# Altium PCB PenguinPi_HAT.PcbDoc
Units mil, origin at the board's own origin, x right, y up, seen from the top; angles counter-clockwise.
Board outline 2559.11 x 2204.72 mil, 2 copper layers (Top Layer, Bottom Layer); 43 components, 59 nets, 184 pads, 32 vias.
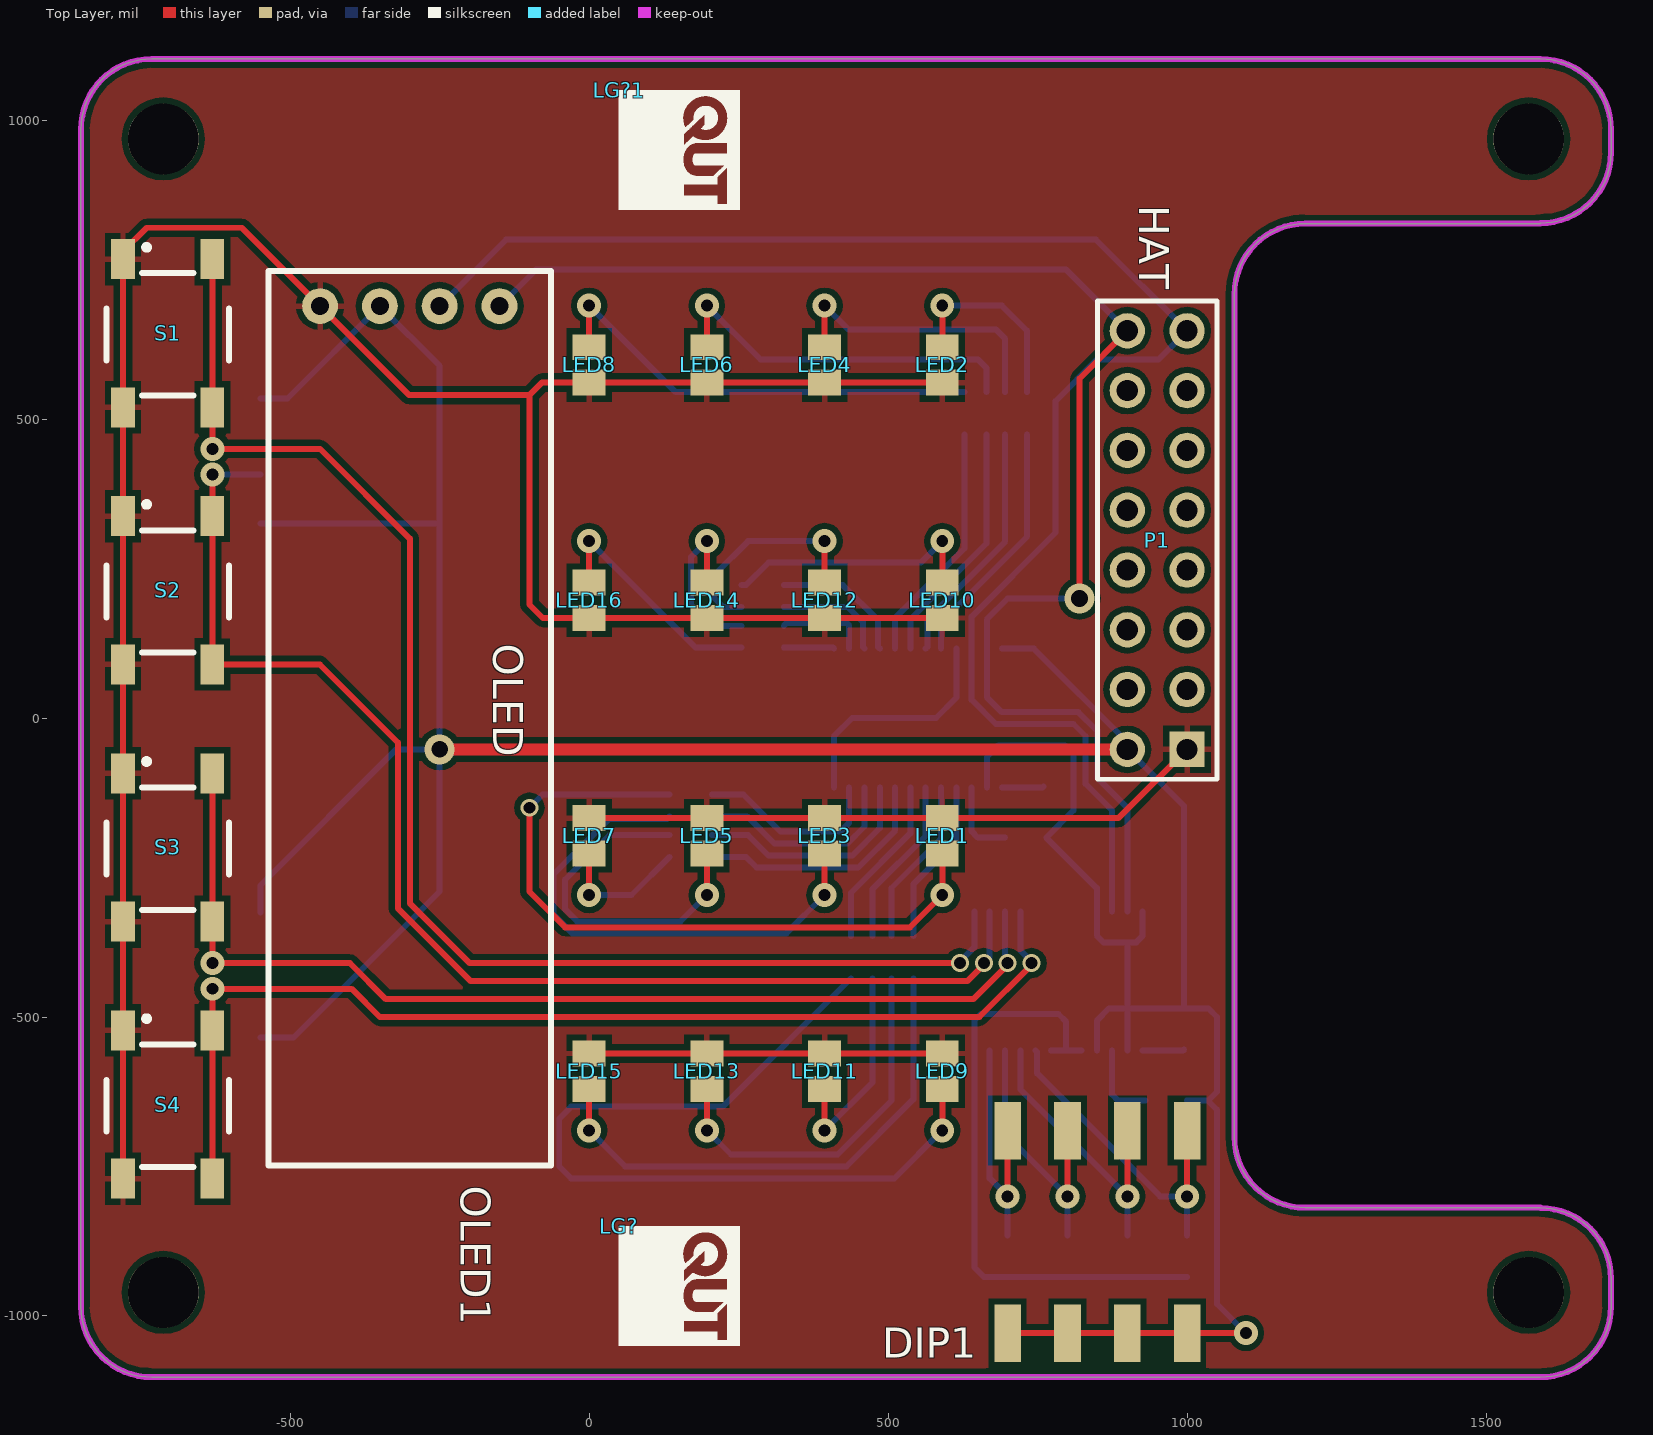
[diagram p0: Top Layer view]
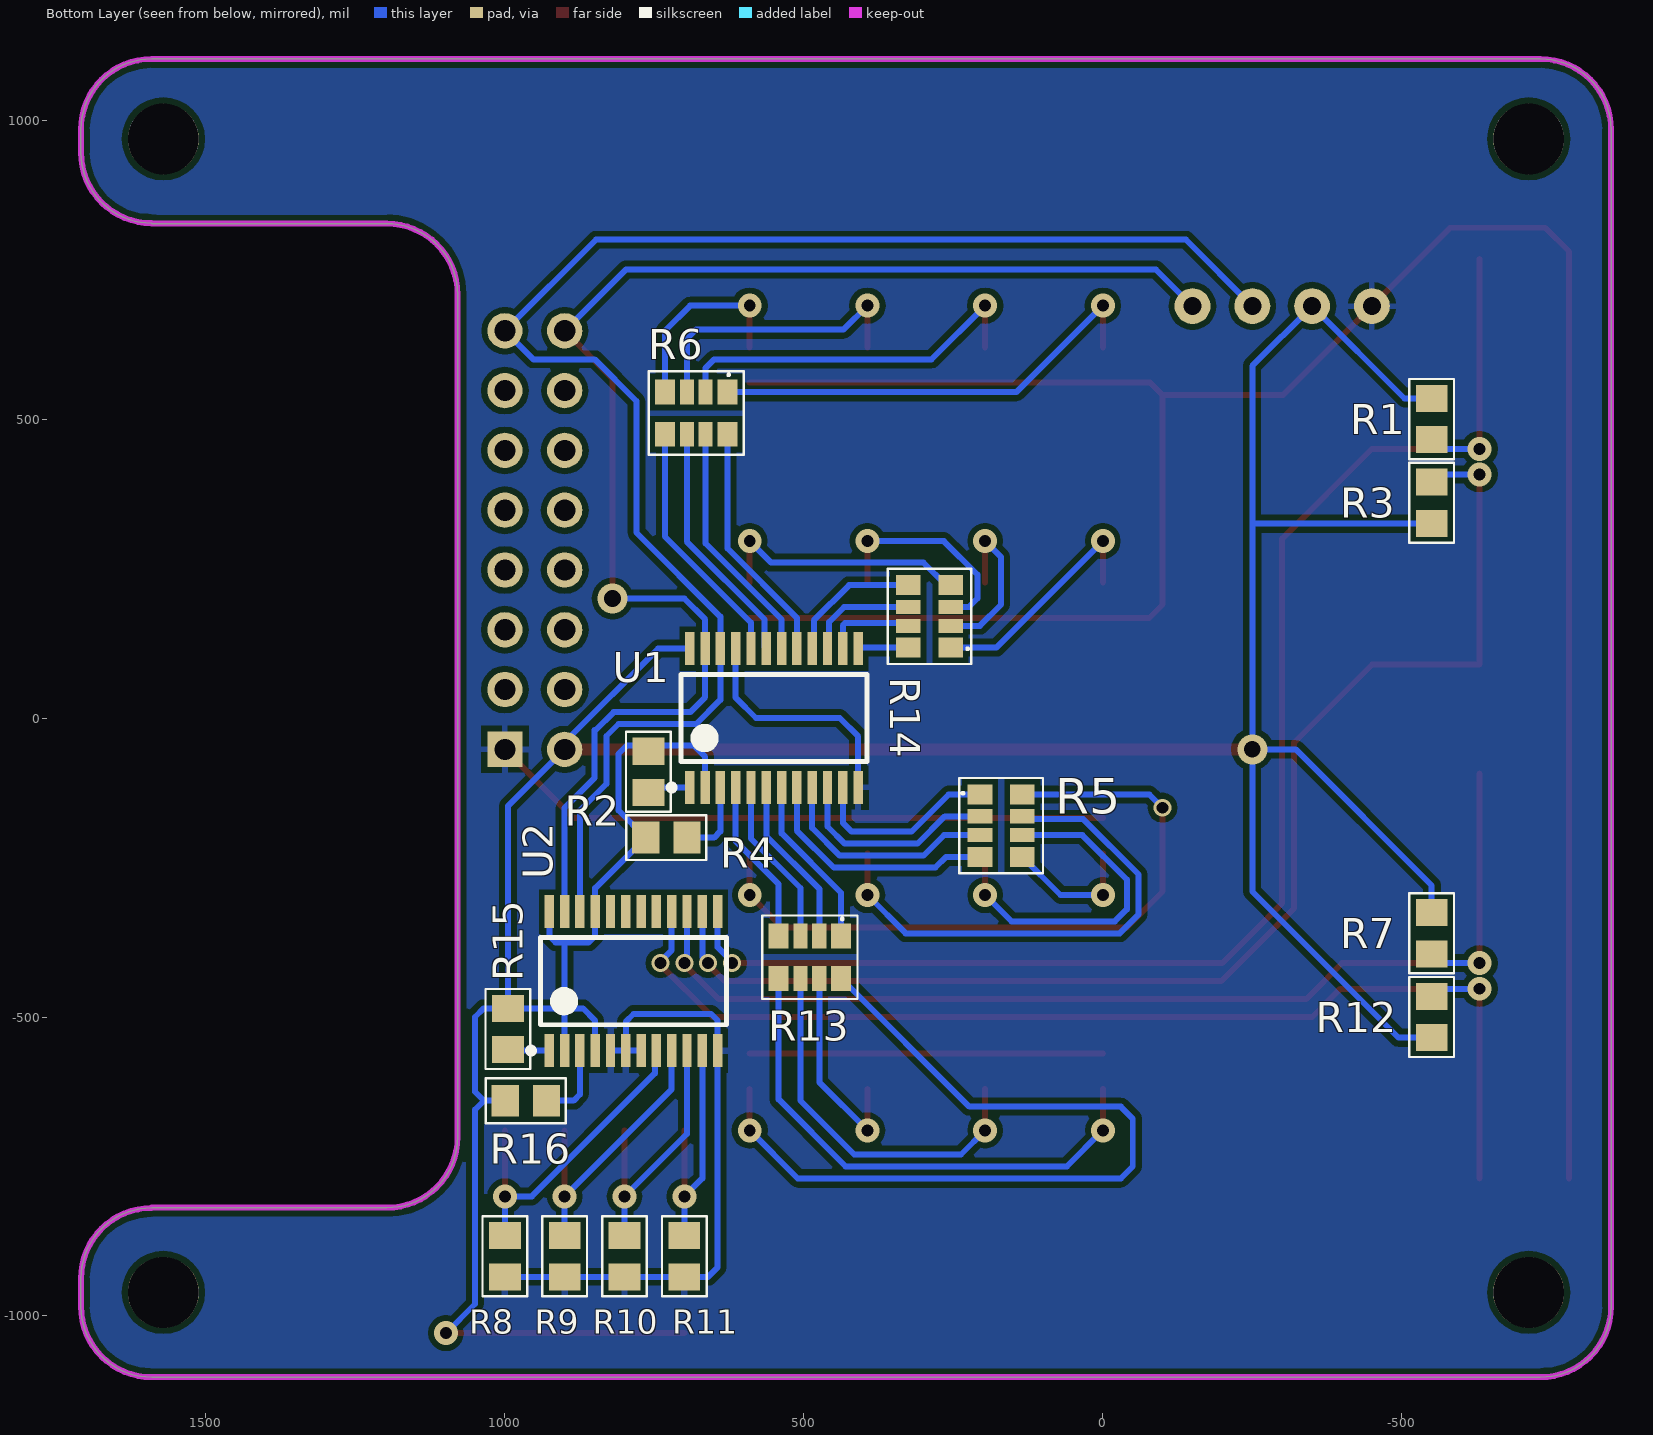
[diagram p1: Bottom Layer view, seen from below]
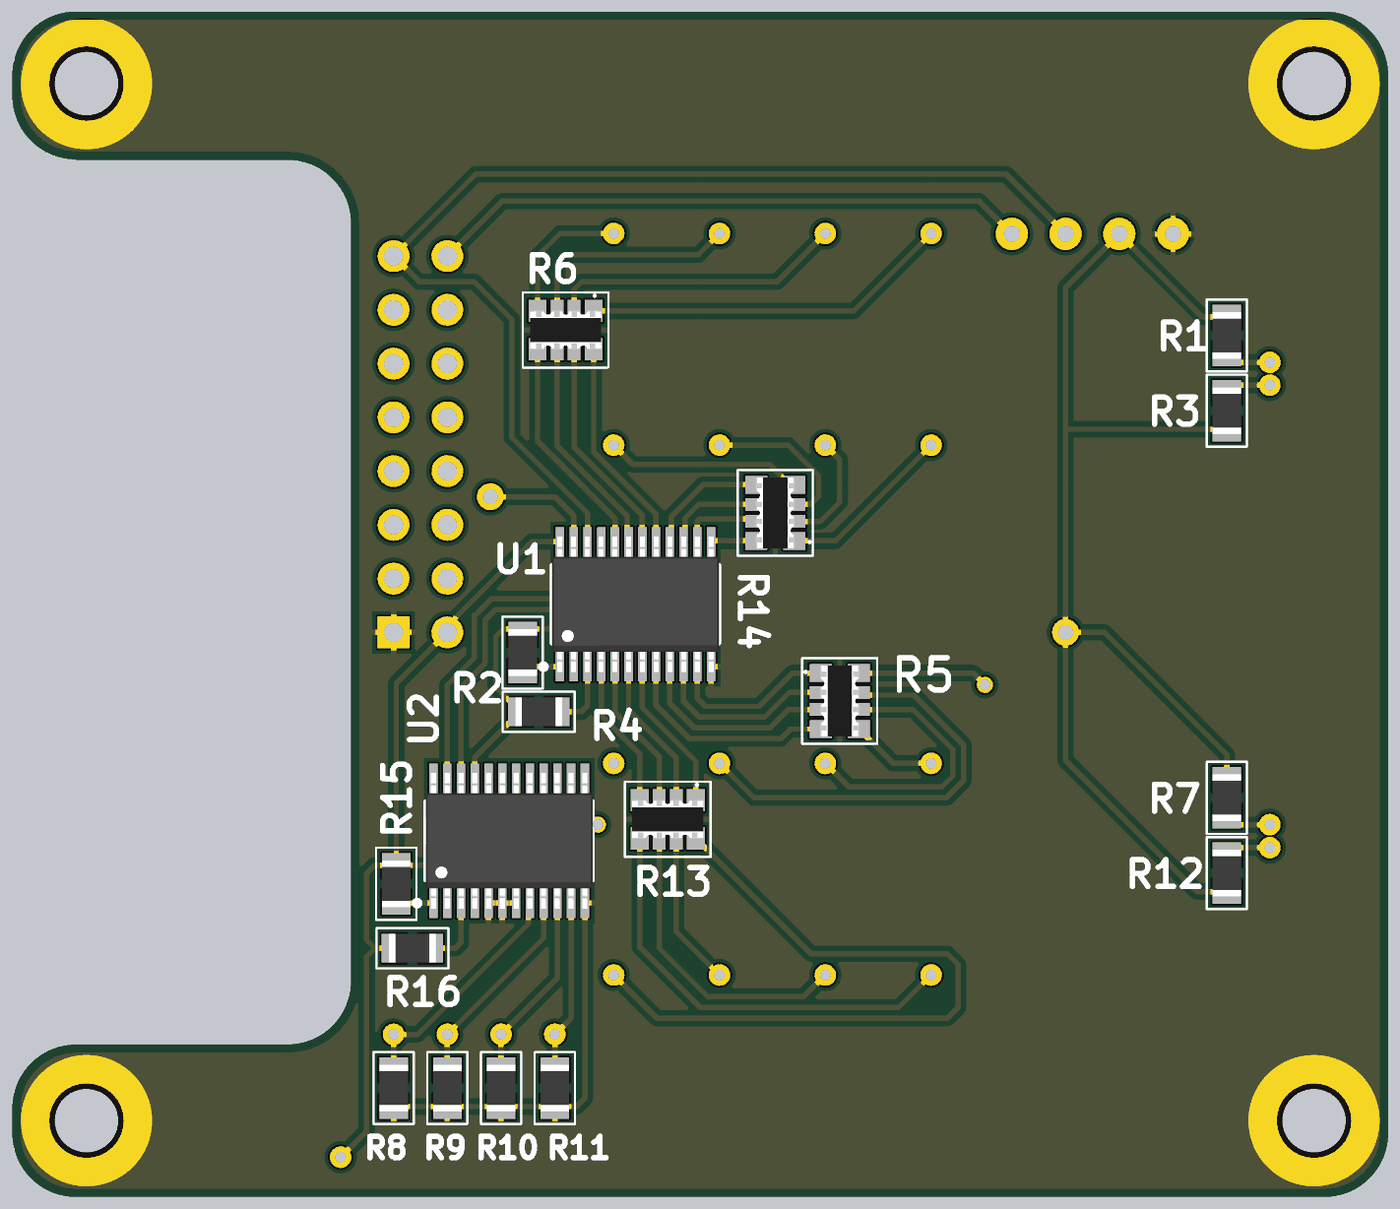
[diagram p2: 3D render of the assembled board from below, using the file's embedded part models]

## Layer stack, top to bottom
Top Solder: solder mask 0.4, Solder Resist, Dk 3.5
Top Layer: signal copper 1.4
Dielectric 1: dielectric 12.6, FR-4, Dk 4.8
Bottom Layer: signal copper 1.4
Bottom Solder: solder mask 0.4, Solder Resist, Dk 3.5

## Board outline
-850,-984.25 -850,984.25 cw(c-731.89,984.25) -731.89,1102.36 1591,1102.36 cw(c1591,984.25) 1709.11,984.25 1709.06,984.25 1709.06,945.75 cw(c1590.94,945.75) 1590.94,827.64 1590.94,826.77 1197.24,826.77 ccw(c1197.24,708.66) 1079.13,708.66 1079.13,-700.79 ccw(c1197.24,-700.79) 1197.24,-818.9 1590.94,-818.9 1590.94,-819.25 cw(c1590.94,-937.36) 1709.06,-937.36 1709.06,-984.25 cw(c1590.94,-984.25) 1590.94,-1102.36 -731.89,-1102.36 cw(c-731.89,-984.25)

## Design rules (kind name [scope] priority, off if disabled: settings)
Clearance [All] p1: gap=10
PolygonConnect [All] p1: connectstyle=Relief reliefconductorwidth=10 reliefentries=4 polygonreliefangle="90 Angle" airgapwidth=10
RoutingVias [All] p1: holewidth=28 width=50 viastyle="Through Hole" minholewidth=28 minwidth=50 maxholewidth=28 maxwidth=50
SolderMaskExpansion [All] p1: expansion=4
Width [All] p1: maxlimit=10 minlimit=10 preferedwidth=10
30 further rules are at their usual default settings.

## Components (designator, comment, footprint, x,y, rotation, side; value= is the part's Value field where it differs from the comment)
DIP1 "DIP Switch (4way)" "DIP SMD" 1000,-1028.58 r0 top locked
LED1 "LED*" C0805 590.55,-196.85 r90 top
LED2 "LED*" C0805 590.55,590.55 r270 top
LED3 "LED*" C0805 393.7,-196.85 r90 top
LED4 "LED*" C0805 393.7,590.55 r270 top
LED5 "LED*" C0805 196.85,-196.85 r90 top
LED6 "LED*" C0805 196.85,590.55 r270 top
LED7 "LED*" C0805 0,-196.85 r90 top
LED8 "LED*" C0805 0,590.55 r270 top
LED9 "LED*" C0805 590.55,-590.55 r90 top
LED10 "LED*" C0805 590.55,196.85 r270 top
LED11 "LED*" C0805 393.7,-590.55 r90 top
LED12 "LED*" C0805 393.7,196.85 r270 top
LED13 "LED*" C0805 196.85,-590.55 r90 top
LED14 "LED*" C0805 196.85,196.85 r270 top
LED15 "LED*" C0805 0,-590.55 r90 top
LED16 "LED*" C0805 0,196.85 r270 top
LG? "QUT_Logo" QUT_Logo 50,-850 r270 top
LG?1 "QUT_Logo" QUT_Logo 50,1050 r270 top locked (schematic designator LG?)
OLED1 "OLED" OLED -300,688.98 r270 top locked
P1 "HAT" HDR2X8 1000,-52.36 r90 top locked
R1 "RES SMD" RESC2012X07N -550,500 r270 bottom
R2 "RES SMD" RESC2012X07N 760,-90 r90 bottom
R3 "RES SMD" RESC2012X07N -550,360 r90 bottom
R4 "RES SMD" RESC2012X07N 730,-200 r0 bottom
R5 "ARRAY" CAC-80P319X155-8M 170,-180 r180 bottom
R6 "ARRAY" CAC-80P319X155-8M 680,510 r270 bottom
R7 "RES SMD" RESC2012X07N -550,-360 r270 bottom
R8 "RES SMD" RESC2012X07N 1000,-900 r90 bottom
R9 "RES SMD" RESC2012X07N 900,-900 r90 bottom
R10 "RES SMD" RESC2012X07N 800,-900 r90 bottom
R11 "RES SMD" RESC2012X07N 700,-900 r90 bottom
R12 "RES SMD" RESC2012X07N -550,-500 r90 bottom
R13 "ARRAY" CAC-80P319X155-8M 490,-400 r270 bottom
R14 "ARRAY" CAC-80P319X155-8M 290,170 r0 bottom
R15 "RES SMD" RESC2012X07N 995,-520 r90 bottom
R16 "RES SMD" RESC2012X07N 965,-640 r0 bottom
S1 "B1" E-SWITCH-TL3342 -779.61,767.64 r270 top
S2 "B1" E-SWITCH-TL3342 -779.61,337.64 r270 top
S3 "B1" E-SWITCH-TL3342 -779.61,-92.36 r270 top
S4 "B1" E-SWITCH-TL3342 -779.61,-522.36 r270 top
U1 "PCA6416A" TSOP65P640X110-24N 550,0 r90 bottom
U2 "PCA6416A" TSOP65P640X110-24N 785,-440 r90 bottom

## Footprints (in the part's own frame and the unit in brackets; to place one, negate y for a bottom-side part, rotate by r counter-clockwise, add the part's x,y. Pads: shape width x height; smd on the part's side, far side on the other; paste and mask are expansions set on the pad)
C0805 [mm] "Chip Capacitor, Body 2.0x1.3mm, IPC High Density"
  rect 1.1x1.4 smd: 1(-0.75,0) 2(0.75,0)
  body extent -1.1,-0.72 1.1,0.72, height 1.4
CAC-80P319X155-8M [mm] "Chip Array, ConvexS, 8-Leads, Pitch 0.80mm,  Body 3.20x1.55mm,  IPC Low Density"
  rect 1.05x0.85 smd: 1(-0.9,1.325) 4(-0.9,-1.325) 5(0.9,-1.325) 8(0.9,1.325)
  rect 1.05x0.6 smd: 2(-0.9,0.4) 3(-0.9,-0.4) 6(0.9,-0.4) 7(0.9,0.4)
  silkscreen extent -1.78,-2.02 1.78,2.02, body extent -0.92,-1.67 0.93,1.67, height 0.7
"DIP SMD" [mm] "Digikey CT2194MST-ND"
  rect 1.13x2.44 smd: 0(-7.62,0) 1(-5.08,0) 2(-2.54,0) 3(0,0) 4(0,8.6) 5(-2.54,8.6) 6(-5.08,8.6) 7(-7.62,8.6)
E-SWITCH-TL3342 [mm]
  rect 1.7x1 smd: 1(0,0) 2(6.3,0) 3(0,3.8) 4(6.3,3.8)
  silkscreen extent -0.6,-0.7 5.8,4.5, body extent 0,-0.7 6.4,4.5, height 1.54
HDR2X8 [mm] "Connector; Header; 8x2 Position"
  rect 1.5x1.5 hole 0.9: 1(0,0)
  round 1.5 hole 0.9: 2(0,2.54) 3(2.54,0) 4(2.54,2.54) 5(5.08,0) 6(5.08,2.54) 7(7.62,0) 8(7.62,2.54) 9(10.16,0) 10(10.16,2.54) 11(12.7,0) 12(12.7,2.54) 13(15.24,0) 14(15.24,2.54) 15(17.78,0) 16(17.78,2.54)
  silkscreen extent -1.27,-1.27 19.05,3.81
OLED [mil]
  round 60 hole 30: 1(0,-150) 2(0,-50) 3(0,50) 4(0,150)
  silkscreen extent -59,-236 1437,236
QUT_Logo [mil]
  silkscreen extent 0,0 200,202
RESC2012X07N [mm] "Chip Resistor, 2-Leads, Body 2.00x1.25mm, IPC Medium Density"
  rect 1.15x1.35 smd: 1(-0.875,0) 2(0.875,0)
  silkscreen extent -1.7,-0.95 1.7,0.95, body extent -1.1,-0.68 1.1,0.67, height 0.7
TSOP65P640X110-24N [mm] "TSOP, 24-Leads, Body 7.80x4.40mm, Pitch 0.65mm, IPC Medium Density"
  rect 1.4x0.4 smd: 1(-2.95,3.575) 2(-2.95,2.925) 3(-2.95,2.275) 4(-2.95,1.625) 5(-2.95,0.975) 6(-2.95,0.325) 7(-2.95,-0.325) 8(-2.95,-0.975) 9(-2.95,-1.625) 10(-2.95,-2.275) 11(-2.95,-2.925) 12(-2.95,-3.575) 13(2.95,-3.575) 14(2.95,-2.925) 15(2.95,-2.275) 16(2.95,-1.625) 17(2.95,-0.975) 18(2.95,-0.325) 19(2.95,0.325) 20(2.95,0.975) 21(2.95,1.625) 22(2.95,2.275) 23(2.95,2.925) 24(2.95,3.575)
  silkscreen extent -3.07,-3.95 1.85,4.47, body extent -3.2,-3.95 3.2,3.95, height 1.1

## Part data
LED1 LED2 LED3 LED4 LED5 LED6 LED7 LED8 LED9 LED10 LED11 LED12 LED13 LED14 LED15 LED16: library part LED
P1: library part "Header 8X2", "Header, 8-Pin, Dual row"
R1 R2 R3 R4 R7 R8 R9 R10 R11 R12 R15 R16: "0805 surface mount resistor"
R5 R6 R13 R14: library part RES-ARRAY, "Surface mount resistor array"
S1 S2 S3 S4: library part E-SWITCH-PUSHBUTTON, "TL 3342 surface mount pushbutton"
U1 U2: library part PCA6416APW, "Low-voltage translating 16-bit I2C I/O port expander"

## Free pads (board coordinates)
  round 118.11 hole 118.11 unplated mask+62.99: 0(-712.2,-960.63) 1(1571.26,-960.63) 2(1571.26,968.5) 3(-712.2,968.5)

## Via types
v1: diameter 40, hole 20, Top Layer to Bottom Layer, 25 vias
v2: diameter 30, hole 20, Top Layer to Bottom Layer, 5 vias
v3: diameter 50, hole 28, Top Layer to Bottom Layer, 2 vias

## Nets (pads, with @x,y where several pads share a name; then routed paths per layer and width w, separated by ;. In a path a pad name is that pad's centre, name@x,y a point inside that pad or via, vN(x,y) a via of type N, cw(c..) or ccw(c..) an arc to the next point about the centre after c; other vN are vias at no path point)
3V3: DIP1.0 DIP1.1 DIP1.2 DIP1.3 OLED1.2 P1.2 R1.1 R2.2 R3.1 R4.2 R7.1 R12.1 R15.2 R16.2 U1.2 U1.24 U2.2 U2.4 U2.21 U2.24 | length 6470.6
  Top Layer w10: DIP1.0 DIP1.1 DIP1.2 DIP1.3 v1(1098.58,-1028.58)
  Top Layer w20: v3(-250,-52.36) P1.2
  Bottom Layer w10: R12.1 -494.45,-534.45 -250,-290 v3(-250,-52.36) ; R7.1 -550,-280 -322.36,-52.36 v3(-250,-52.36) ; R3.1 -250,325.55 ; R1.1 -504.53,534.45 OLED1.2 -250,588.98 -250,325.55 ; U1.2 665.16,-64.84 684.45,-45.55 795.55,-45.55 810,-60 810,-154.45 R4.2 848.98,-284.53 U2.21 848.98,-363.98 860,-375 900,-375 ; U1.24 743.86,116.14 900,-40 P1.2 995,-147.36 R15.2 ; U2.4 848.98,-506.02 869.45,-485.55 900.16,-485.55 ; U2.2 900.16,-485.55 ; U2.24 925.75,-364.25 915,-375 900,-375 ; R16.2 1035,-640 ; v1(1098.58,-1028.58) 1050,-980 1050,-655 1035,-640 ; v3(-250,-52.36) -250,325.55 ; 900,-375 900.16,-375.16 900.16,-485.55 ; 900.16,-485.55 R15.2 ; R15.2 1035.55,-485.55 1050,-500 1050,-625 1035,-640
BTN0: R1.2 S1.3 S1.4 U2.13 | length 2457.4
  Top Layer w10: S1.3 S1.4 v1(-630,450) -450,450 -300,300 -300,-310 -200,-410 v2(620,-410)
  Bottom Layer w10: v1(-630,450) R1.2@-550,450 ; v2(620,-410) 620,-407.57 644.25,-383.32 U2.13
BTN1: R3.2 S2.3 S2.4 U2.14 | length 2173.6
  Top Layer w10: S2.3 S2.4 -450.39,89.61 -320,-40.79 -320,-318.28 -198.28,-440 632.43,-440 660,-412.43 v2(660,-410) ; S2.3@-630,338.03 v1(-630,407.64)
  Bottom Layer w10: v1(-630,407.64) R3.2@-550,407.64 ; v2(660,-410) 669.84,-400.16 U2.14
BTN2: R7.2 S3.3 S3.4 U2.15 | length 1866.8
  Top Layer w10: S3.3 S3.4 v1(-630,-410) -400,-410 -340,-470 642.43,-470 700,-412.43 v2(700,-410)
  Bottom Layer w10: v1(-630,-410) R7.2@-550,-410 ; U2.15 695.43,-405.43 v2(700,-410)
BTN3: R12.2 S4.3 S4.4 U2.16 | length 1919.9
  Top Layer w10: S4.4 S4.3 v1(-630,-452.76) -397.24,-452.76 -350,-500 652.43,-500 740,-412.43 v2(740,-410)
  Bottom Layer w10: v1(-630,-452.76) R12.2@-550,-452.76 ; U2.16 721.02,-388.6 740,-407.57 v2(740,-410)
DIP0: DIP1.4 R8.2 U2.8 | length 550.7
  Top Layer w10: v1(1000,-800) DIP1.4
  Bottom Layer w10: U2.8 749.33,-558.86 749.33,-594.33 955,-800 v1(1000,-800) R8.2
DIP1: DIP1.5 R9.2 U2.9 | length 493.5
  Top Layer w10: v1(900,-800) DIP1.5
  Bottom Layer w10: U2.9 721.02,-621.02 v1(900,-800) R9.2
DIP2: DIP1.6 R10.2 U2.10 | length 462.7
  Top Layer w10: v1(800,-800) DIP1.6
  Bottom Layer w10: U2.10 695.43,-695.43 v1(800,-800) R10.2
DIP3: DIP1.7 R11.2 U2.11 | length 431.9
  Top Layer w10: v1(700,-800) DIP1.7
  Bottom Layer w10: U2.11 669.84,-769.84 v1(700,-800) R11.2
GND: LED1.2 LED2.2 LED3.2 LED4.2 LED5.2 LED6.2 LED7.2 LED8.2 LED9.2 LED10.2 LED11.2 LED12.2 LED13.2 LED14.2 LED15.2 LED16.2 OLED1.1 P1.1 R8.1 R9.1 R10.1 R11.1 S1.1 S1.2 S2.1 S2.2 S3.1 S3.2 S4.1 S4.2 U1.12 U1.21 U2.5 U2.6 U2.7 U2.12 | length 7187.3
  Top Layer w10: S4.2 S4.1 S3.2 S3.1 S2.2 S2.1 S1.2 S1.1 -779.61,780.39 -740,820 -581.02,820 OLED1.1 -301.02,540 -100,540 ; LED15.2 LED13.2 LED11.2 LED9.2 ; LED7.2 LED5.2 LED3.2 LED1.2 885.04,-167.32 P1.1 ; LED10.2 LED12.2 LED14.2 LED16.2 -77.32,167.32 -100,190 -100,540 ; LED2.2 LED4.2 LED6.2 LED8.2 -78.98,561.02 -100,540
  Bottom Layer w10: U1.12 409.25,-30.75 440,0 580,0 613.98,33.98 U1.21 ; U2.7 U2.6 ; U2.5 U2.6 ; R8.1 R9.1 R10.1 R11.1 660,-934.45 644.25,-918.7 U2.12 644.25,-505.75 655,-495 785,-495 797.8,-507.8 U2.6
HAT_00: P1.3
HAT_01: P1.5
HAT_02: P1.7
HAT_03: P1.9
HAT_04: P1.10
HAT_05: P1.8
HAT_06: P1.6
HAT_07: P1.4
IO0_0: LED15.1 R13.5 | length 885.6
  Top Layer w10: v1(0,-689.68) LED15.1
  Bottom Layer w10: v1(0,-689.68) 60.31,-750 430,-750 542.17,-637.83 R13.5
IO0_1: LED13.1 R13.6 | length 637
  Top Layer w10: v1(196.85,-689.68) LED13.1
  Bottom Layer w10: v1(196.85,-689.68) 237.17,-730 415.75,-730 505.75,-640 R13.6
IO0_2: LED11.1 R13.7 | length 357.2
  Top Layer w10: v1(393.7,-689.68) LED11.1
  Bottom Layer w10: v1(393.7,-689.68) 474.25,-609.13 R13.7
IO0_3: LED9.1 R13.8 | length 1416.7
  Top Layer w10: v1(590.55,-689.68) LED9.1
  Bottom Layer w10: R13.8 223.27,-650 -30,-650 -50,-670 -50,-750 -30,-770 510.24,-770 v1(590.55,-689.68)
IO0_4: LED7.1 R5.5 | length 230.6
  Top Layer w10: v1(0,-295.98) LED7.1
  Bottom Layer w10: v1(0,-295.98) 70.75,-295.98 R5.5
IO0_5: LED5.1 R5.6 | length 588.3
  Top Layer w10: v1(196.85,-295.98) LED5.1
  Bottom Layer w10: R5.6 34.25,-195.75 -40,-270 -40,-320 -20,-340 152.83,-340 v1(196.85,-295.98)
IO0_6: LED3.1 R5.7 | length 864.5
  Top Layer w10: v1(393.7,-295.98) LED3.1
  Bottom Layer w10: R5.7 129.88,-168.94 32.78,-168.94 -60,-261.72 -60,-328.28 -28.28,-360 329.68,-360 v1(393.7,-295.98)
IO0_7: LED1.1 R5.8 | length 1191.1
  Top Layer w10: v2(-100,-150) -100,-290 -40,-350 536.54,-350 v1(590.55,-295.98) LED1.1
  Bottom Layer w10: v2(-100,-150) -77.83,-127.83 R5.8
IO1_0: LED16.1 R14.1 | length 398
  Top Layer w10: LED16.1 v1(0,295.98)
  Bottom Layer w10: v1(0,295.98) 178.15,117.83 R14.1
IO1_1: LED14.1 R14.2 | length 286.1
  Top Layer w10: LED14.1 v1(196.85,295.98)
  Bottom Layer w10: v1(196.85,295.98) 170,269.13 170,190 205.75,154.25 R14.2
IO1_2: LED12.1 R14.3 | length 367
  Top Layer w10: LED12.1 v1(393.7,295.98)
  Bottom Layer w10: R14.3 224.25,185.75 210,200 210,240 265.98,295.98 v1(393.7,295.98)
IO1_3: LED10.1 R14.4 | length 436.2
  Top Layer w10: LED10.1 v1(590.55,295.98)
  Bottom Layer w10: R14.4 262.17,222.17 300,260 554.57,260 v1(590.55,295.98)
IO1_4: LED8.1 R6.1 | length 757.2
  Top Layer w10: LED8.1 v1(0,689.68)
  Bottom Layer w10: v1(0,689.68) 144.25,545.43 R6.1
IO1_5: LED6.1 R6.2 | length 620.4
  Top Layer w10: LED6.1 v1(196.85,689.68)
  Bottom Layer w10: v1(196.85,689.68) 286.54,600 650,600 664.25,585.75 R6.2
IO1_6: LED4.1 R6.3 | length 483.4
  Top Layer w10: LED4.1 v1(393.7,689.68)
  Bottom Layer w10: v1(393.7,689.68) 433.39,650 680,650 695.75,634.25 R6.3
IO1_7: LED2.1 R6.4 | length 331
  Top Layer w10: LED2.1 v1(590.55,689.68)
  Bottom Layer w10: v1(590.55,689.68) 690.32,689.68 732.17,647.83 R6.4
MISO: P1.14
MOSI: P1.13
NetR2_1: R2.1 U1.1 | length 70
  Bottom Layer w10: U1.1 758.31,-116.14 R2.1@760,-114.45
NetR4_1: R4.1 U1.3 | length 133.7
  Bottom Layer w10: U1.3 639.57,-189.57 650,-200 R4.1
NetR5_1: R5.1 U1.11 | length 320.3
  Bottom Layer w10: R5.1 257.83,-127.83 320,-190 420,-190 434.84,-175.16 U1.11
NetR5_2: R5.2 U1.10 | length 351
  Bottom Layer w10: R5.2 264.25,-164.25 310,-210 431.72,-210 460.43,-181.28 U1.10
NetR5_3: R5.3 U1.9 | length 381.7
  Bottom Layer w10: R5.3 265.75,-195.75 300,-230 440,-230 486.02,-183.98 U1.9
NetR5_4: R5.4 U1.8 | length 411.3
  Bottom Layer w10: R5.4 262.17,-232.17 280,-250 450,-250 511.61,-188.39 U1.8
NetR6_5: R6.5 U1.20 | length 418
  Bottom Layer w10: U1.20 588.39,159.47 732.17,303.25 R6.5
NetR6_6: R6.6 U1.19 | length 413.5
  Bottom Layer w10: U1.19 565.51,118.86 565.51,164.88 695.75,295.12 R6.6
NetR6_7: R6.7 U1.18 | length 411
  Bottom Layer w10: U1.18 537.2,164.86 664.25,291.9 R6.7
NetR6_8: R6.8 U1.17 | length 406.6
  Bottom Layer w10: U1.17 511.61,167.55 627.83,283.77 R6.8
NetR13_1: R13.1 U1.7 | length 289.6
  Bottom Layer w10: R13.1 437.83,-292.17 537.2,-192.8 U1.7
NetR13_2: R13.2 U1.6 | length 285.1
  Bottom Layer w10: R13.2 474.25,-285.75 562.8,-197.2 U1.6
NetR13_3: R13.3 U1.5 | length 282.7
  Bottom Layer w10: R13.3 505.75,-284.25 588.39,-201.61 U1.5
NetR13_4: R13.4 U1.4 | length 278.2
  Bottom Layer w10: R13.4 542.17,-277.83 613.98,-206.02 U1.4
NetR14_5: R14.5 U1.16 | length 230.5
  Bottom Layer w10: R14.5 424.4,222.17 483.31,163.26 483.31,118.86 U1.16
NetR14_6: R14.6 U1.15 | length 188.3
  Bottom Layer w10: R14.6 432.54,185.75 457.72,160.57 457.72,118.86 U1.15
NetR14_7: R14.7 U1.14 | length 151.7
  Bottom Layer w10: R14.7 329.88,158.7 431.3,158.7 434.84,155.16 U1.14
NetR14_8: R14.8 U1.13 | length 84.5
  Bottom Layer w10: R14.8 407.56,117.83 U1.13
NetR15_1: R15.1 U2.1 | length 70
  Bottom Layer w10: U2.1 993.31,-556.14 R15.1
NetR16_1: R16.1 U2.3 | length 133.7
  Bottom Layer w10: U2.3 874.57,-629.57 885,-640 R16.1
SCL: OLED1.3 P1.15 U1.22 U2.22 | length 2715.7
  Top Layer w10: P1.15@997.64,647.64 P1.15
  Bottom Layer w10: OLED1.3 -138.98,800 847.64,800 P1.15 952.36,600 850,600 780,530 780,310 639.57,169.57 U1.22 639.57,30.43 680,-10 810,-10 830,-30 830,-110 874.57,-154.57 U2.22
SCLK: P1.11
SDA: OLED1.4 P1.16 U1.23 U2.23 | length 2430.2
  Top Layer w10: v3(820,200) 820,567.64 P1.16
  Bottom Layer w10: OLED1.4 -88.98,750 797.64,750 P1.16 ; v3(820,200) 700,200 665.16,165.16 U1.23 665.16,34.84 690,10 818.28,10 848.28,-20 850,-20 850,-100 900.16,-150.16 U2.23
pads on no net: P1.12 U2.17 U2.18 U2.19 U2.20

## Polygon pours and split planes (outlines as drawn)
GND on Bottom Layer "Bottom Layer-GND" (solid, pour order 0): -850,-1100 -850,1100 1709.11,1100 1709.11,827.59 1197.24,826.77 1110.85,789.2 1070.24,699.76 1079.13,20 1079.13,-700.79 1119.93,-790.08 1197.24,-818.9 1709.11,-819.85 1709.11,-1100
GND on Top Layer "TOP Layer-GND" (solid, pour order 4): -850,-1100 -850,1100 1709.11,1100 1709.11,827.59 1197.24,826.77 1110.85,789.2 1070.24,699.76 1079.13,20 1079.13,-700.79 1119.93,-790.08 1197.24,-818.9 1709.11,-819.85 1709.11,-1100

## Keep-outs
Keep-Out Layer:
  lines w10: 1590.94,-819.25 cw(c1590.94,-937.36) 1709.06,-937.36 1709.06,-984.25 cw(c1590.94,-984.25) 1590.94,-1102.36 -731.89,-1102.36 cw(c-731.89,-984.25) -850,-984.25 -850,-922.64 -850,922.64 -850,984.25 cw(c-731.89,984.25) -731.89,1102.36 1591,1102.36 cw(c1591,984.25) 1709.11,984.25 ; 1590.94,-818.9 1197.24,-818.9 cw(c1197.24,-700.79) 1079.13,-700.79 1079.13,708.66 cw(c1197.24,708.66) 1197.24,826.77 1590.94,826.77 ; 1590.94,827.64 ccw(c1590.94,945.75) 1709.06,945.75 1709.06,984.25

## Silkscreen, mask and mechanical layers (free items; w line width, h text height)
Mechanical 1:
  lines w10: 1590.94,-819.25 cw(c1590.94,-937.36) 1709.06,-937.36 1709.06,-984.25 cw(c1590.94,-984.25) 1590.94,-1102.36 -731.89,-1102.36 cw(c-731.89,-984.25) -850,-984.25 -850,-922.64 -850,922.64 -850,984.25 cw(c-731.89,984.25) -731.89,1102.36 1591,1102.36 cw(c1591,984.25) 1709.11,984.25 ; 1590.94,-818.9 1197.24,-818.9 cw(c1197.24,-700.79) 1079.13,-700.79 1079.13,708.66 cw(c1197.24,708.66) 1197.24,826.77 1590.94,826.77 ; 1590.94,827.64 ccw(c1590.94,945.75) 1709.06,945.75 1709.06,984.25